# Altium PCB PCB1.PcbDoc
Units mm, origin at the board's own origin, x right, y up, seen from the top; angles counter-clockwise.
Board outline 30 x 22 mm, 2 copper layers (Top Layer, Bottom Layer); 5 components, 2 nets, 11 pads, 18 vias.
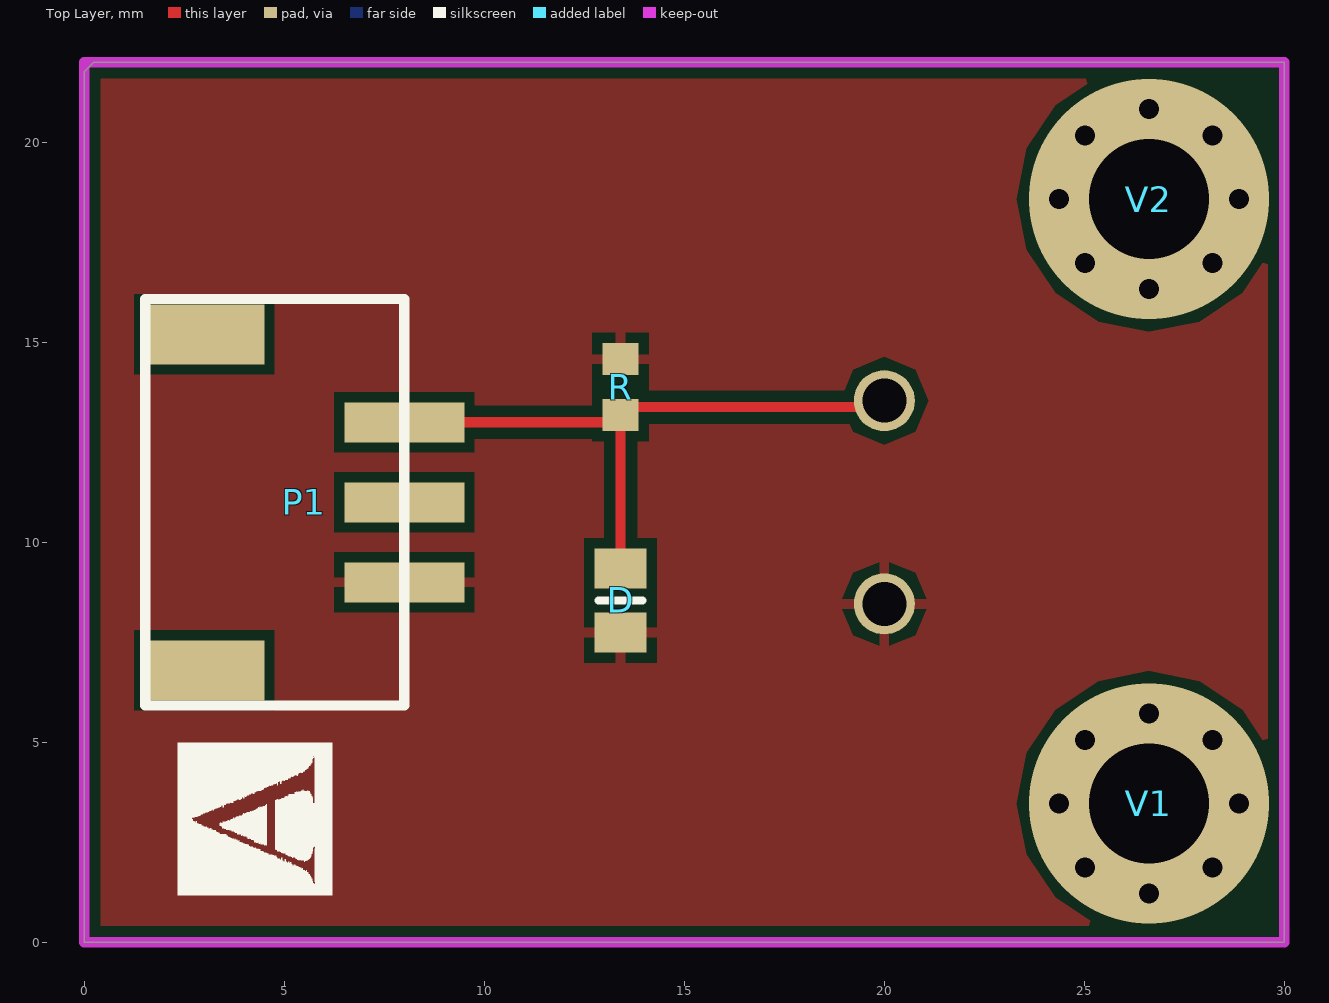
[diagram p0: Top Layer view]
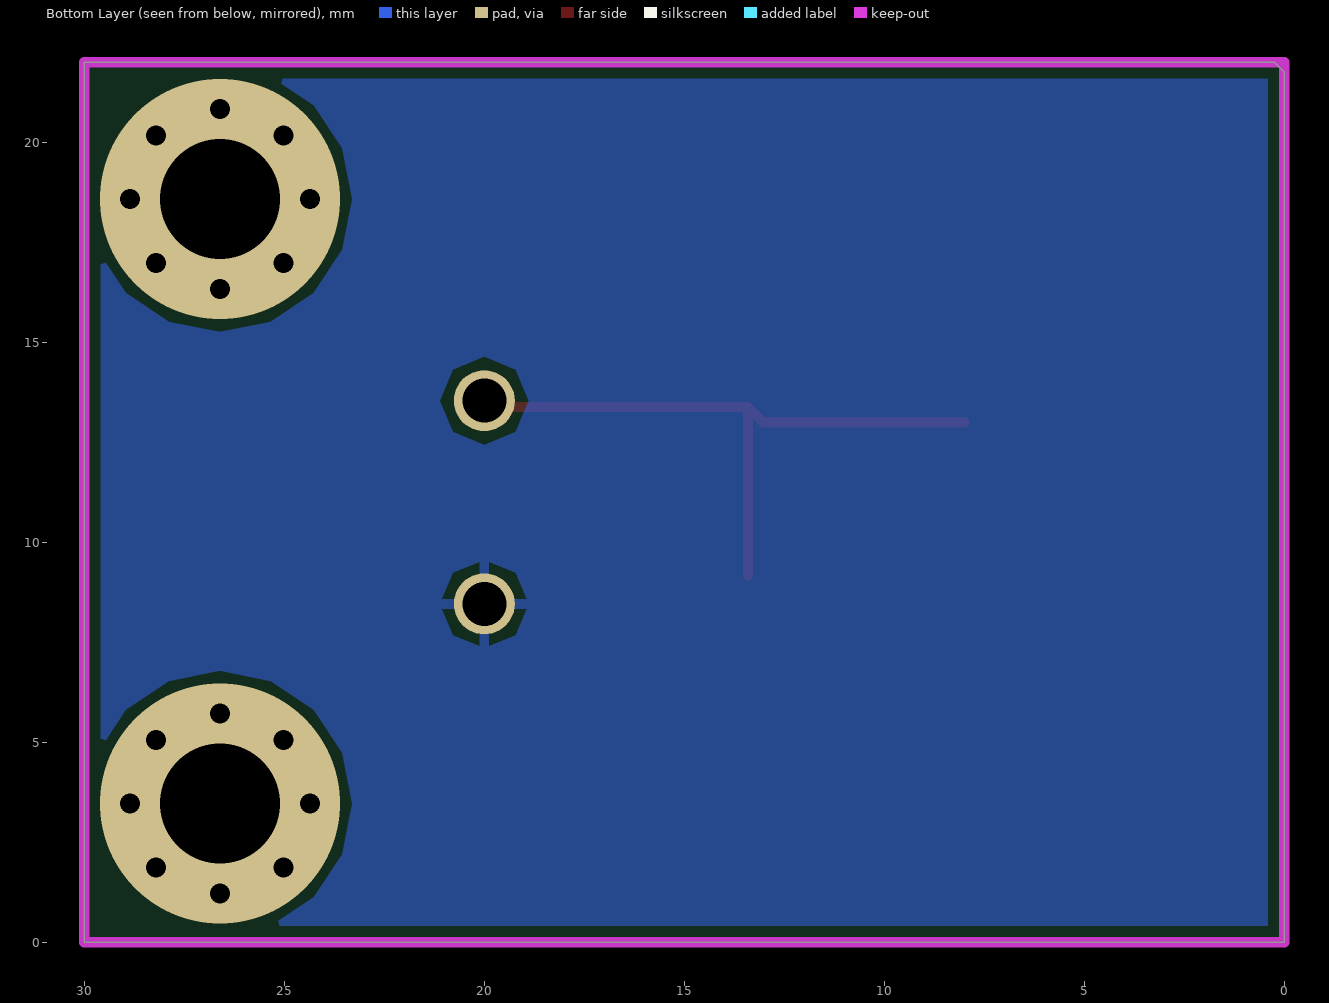
[diagram p1: Bottom Layer view, seen from below]

## Layer stack, top to bottom
Top Layer: signal copper 0.0356
Dielectric: dielectric 0.32, FR-4, Dk 4.8
Bottom Layer: signal copper 0.0356

## Board outline
0,21.755 0.245,22 30,22 30,0 0,0

## Design rules (kind name [scope] priority, off if disabled: settings)
Clearance [All] p1: gap=0.254
PolygonConnect [All] p1: connectstyle=Relief reliefconductorwidth=0.254 reliefentries=4 polygonreliefangle="90 Angle"
RoutingVias [All] p1: holewidth=0.711 width=1.27 viastyle="Through Hole" minholewidth=0.711 minwidth=1.27 maxholewidth=0.711 maxwidth=1.27
SilkscreenOverComponentPads [All] p1: minsilkscreentomaskgap=0.254
SolderMaskExpansion [All] p1: expansion=0.102
Width [All] p1: maxlimit=0.254 minlimit=0.254 preferedwidth=0.254
27 further rules are at their usual default settings.

## Components (designator, comment, footprint, x,y, rotation, side; value= is the part's Value field where it differs from the comment)
D "Diode 1N5408" 6-0805_L 13.406,8.547 r90 top
P1 "Header 3" sh-2.0 8,11 r270 top
R "Res1" 1608[0603] 13.406,13.881 r270 top
V1 "Via" Via 26.614,3.467 r0 top
V2 "Via" Via 26.614,18.58 r0 top

## Footprints (in the part's own frame and the unit in brackets; to place one, negate y for a bottom-side part, rotate by r counter-clockwise, add the part's x,y. Pads: shape width x height; smd on the part's side, far side on the other; paste and mask are expansions set on the pad)
6-0805_L [mm] "Chip Resistor, Body 2.0x1.2mm, IPC High Density"
  rect 1x1.3 smd: 1(-0.8,0) 2(0.8,0)
  silkscreen extent 0,-0.55 0,0.55, body extent -1.07,-0.7 1.07,0.7, height 0.7
1608[0603] [mm] "Chip Capacitor, Body 1.6x0.8mm, IPC High Density"
  rect 0.8x0.9 smd: 1(-0.7,0) 2(0.7,0)
  body extent -0.87,-0.48 0.87,0.48, height 1.3
sh-2.0 [mm]
  rect 1x3 smd: 1(-2,0) 2(0,0) 3(2,0)
  rect 1.5x3 smd: GND(-4.2,-5) GND(4.2,-5)
  silkscreen extent -5.08,-6.48 5.08,0
Via [mm]

## Part data
D: "3 Amp Medium Power Silicon Rectifier Diode"
P1: "Header,"
R: "Resistor"

## Free pads (board coordinates)
  round 1.524 hole 1.1: 0(20,13.54) 1(20,8.46)

## Via types
v1: diameter 1, hole 0.5, Top Layer to Bottom Layer, 16 vias
v2: diameter 6, hole 3, Top Layer to Bottom Layer, 2 vias

## Nets (pads, with @x,y where several pads share a name; then routed paths per layer and width w, separated by ;. In a path a pad name is that pad's centre, name@x,y a point inside that pad or via, vN(x,y) a via of type N, cw(c..) or ccw(c..) an arc to the next point about the centre after c; other vN are vias at no path point)
GND: D.1 P1.3 pad.1 R.1
NetD_2: D.2 P1.1 pad.0 R.2 | length 16.4
  Top Layer w0.254: P1.1 13.025,13 R.2@13.406,13.381 ; D.2@13.406,9.174 R.2@13.406,13.381 ; pad.0 19.841,13.381 R.2@13.406,13.381
pads on no net: P1.2 P1.GND
copper on no net:
  other v1: 26.614,1.217 25.023,1.876 28.205,1.876 24.364,3.467 28.864,3.467 25.023,5.058 28.205,5.058 26.614,5.717 26.614,16.33 25.023,16.989 28.205,16.989 24.364,18.58 28.864,18.58 25.023,20.171 28.205,20.171 26.614,20.83
  other v2: 26.614,3.467 26.614,18.58

## Polygon pours and split planes (outlines as drawn)
GND on Bottom Layer "Top Layer-No Net" (solid, pour order 4): 0,22 30,22 30,0 0,0
GND on Top Layer "Top Layer-No Net" (solid, pour order 6): 0,22 30,22 30,0 0,0

## Keep-outs
Keep-Out Layer:
  lines w0.254: 0,0 30,0 30,22 0,22 0,0

## Silkscreen, mask and mechanical layers (free items; w line width, h text height)
Top Overlay:
  drawing of 1205 lines, arcs and shapes, not listed
Top Solder:
  text "Piezo Disk Vibration" at 0.579,19.85 h1.2
  text "Sensor" at 0.579,17.945 h1.2